# EAGLE board Nusbio 2 - IC2 Extension (EAGLE 9.6.2)

Size 90 x 90 mm. Coordinates in mm from the lower left corner, seen from the top.
Outline: 4,0 0,0 0,4
Outline: 4,0 7.5,0
Outline: 5.5,0 85,0
Outline: 85,0 90,0 90,4
Outline: 90,86 90,90 86,90
Outline: 5,90 0,90 0,86
Outline: 0,4 0,86
Outline: 0,86 arc-90 4,90 5,90
Outline: 5,90 86,90
Outline: 86,90 arc-90 90,86
Outline: 90,86 90,4
Outline: 90,4 arc-90 86,0 85,0
Outline: 85,0 4,0
Outline: 4,0 arc-90 0,4
Copper layers (1*16): Top 0.035mm / dielectric 1.5mm / Bottom 0.035mm
Design rules "default": minimum track width 10mil, minimum drill 24mil, track to track 8mil, track to pad 8mil, pad to pad 8mil, via to via 8mil, smd to smd 8mil, copper to edge 40mil, drill to drill 8mil, minimum pad ring 10mil, minimum via ring 8mil, stop-mask expansion 4mil, vias tented up to drill 0mil, thermal gap 10mil

## Footprints (pad centres in the part's own frame; a part is rotated, then mirrored left to right if it is on the bottom)
1X10-BIG = drill 1.016 pad 1.778 octagon: 1 -11.43,0; 2 -8.89,0; 3 -6.35,0; 4 -3.81,0; 5 -1.27,0; 6 1.27,0; 7 3.81,0; 8 6.35,0; 9 8.89,0; 10 11.43,0
1X06 = drill 1.016 octagon: 1 -6.35,0; 2 -3.81,0; 3 -1.27,0; 4 1.27,0; 5 3.81,0; 6 6.35,0
3,3-PAD = drill 3.3 pad 5.842: B3,3 0,0
1X04 = drill 1.016 long: 1 -3.81,0; 2 -1.27,0; 3 1.27,0; 4 3.81,0
1206 = smd 1.6 x 1.803: A -1.422,0; C 1.422,0
R1206 = smd 1.6 x 1.803: 1 -1.422,0; 2 1.422,0
SOIC8_150MIL = smd 0.6 x 2.2: 1 -1.905,-2.6; 2 -0.635,-2.6; 3 0.635,-2.6; 4 1.905,-2.6; 5 1.905,2.6; 6 0.635,2.6; 7 -0.635,2.6; 8 -1.905,2.6

## Placement (x,y rotation side)
ADS_1115_CONNECTOR  PINHD-1X10  [1X10-BIG]  66,65 270 top
ADS_1115_IN  [1X06]  87.5,40.5 90 top
GPIO_IN  PINHD-1X10  [1X10-BIG]  45,2.26 180 top
GPIO_OUT  PINHD-1X10  [1X10-BIG]  45,87.5 180 top
H1  MOUNT-PAD-ROUND3.3  [3,3-PAD]  6,84 0 top
H2  MOUNT-PAD-ROUND3.3  [3,3-PAD]  84,84 0 top
H3  MOUNT-PAD-ROUND3.3  [3,3-PAD]  6,6 0 top
H4  MOUNT-PAD-ROUND3.3  [3,3-PAD]  84,6 0 top
IC2_OLED_OUT  [1X04]  39.5,25 90 top
IC2_OUT_1  [1X04]  3,18 270 top
IC2_OUT_2  [1X04]  3,34 270 top
IC2_OUT_3  [1X04]  3,50 270 top
IC2_OUT_4  [1X04]  3,66 270 top
LED_POWER  [1206]  45.89,12.31 0 top
R_4K_POWER  [R1206]  25.5,12.5 0 top
U1  [SOIC8_150MIL]  34,47 270 top

## Library data of the parts
ADS_1115_CONNECTOR ADS_1115_IN GPIO_IN GPIO_OUT LED_POWER R_4K_POWER = adafruit
H1-H4 = holes
IC2_OLED_OUT IC2_OUT_1-IC2_OUT_4 = pinhead
U1 = microbuilder

## Nets
ADS_A0: ADS_1115_CONNECTOR.7 ADS_1115_IN.6
ADS_A1: ADS_1115_CONNECTOR.8 ADS_1115_IN.5
ADS_A2: ADS_1115_CONNECTOR.9 ADS_1115_IN.4
ADS_A3: ADS_1115_CONNECTOR.10 ADS_1115_IN.3
ADS_ALERT: ADS_1115_CONNECTOR.6
GND: ADS_1115_CONNECTOR.2 ADS_1115_CONNECTOR.5 ADS_1115_IN.1 GPIO_IN.10 GPIO_OUT.10 IC2_OLED_OUT.1 IC2_OUT_1.2 IC2_OUT_2.2 IC2_OUT_3.2 IC2_OUT_4.2 R_4K_POWER.1 U1.1 U1.2 U1.3 U1.4 U1.7
N$2: LED_POWER.C R_4K_POWER.2
SCL: ADS_1115_CONNECTOR.3 GPIO_IN.1 GPIO_OUT.1 IC2_OLED_OUT.3 IC2_OUT_1.3 IC2_OUT_2.3 IC2_OUT_3.3 IC2_OUT_4.3 U1.6
SDA: ADS_1115_CONNECTOR.4 GPIO_IN.2 GPIO_OUT.2 IC2_OLED_OUT.4 IC2_OUT_1.4 IC2_OUT_2.4 IC2_OUT_3.4 IC2_OUT_4.4 U1.5
VCC: ADS_1115_CONNECTOR.1 ADS_1115_IN.2 GPIO_IN.9 GPIO_OUT.9 IC2_OLED_OUT.2 IC2_OUT_1.1 IC2_OUT_2.1 IC2_OUT_3.1 IC2_OUT_4.1 LED_POWER.A U1.8

## Tracks (layer width: path | path; a pad name or v marks a point on that pad's centre or on a via)
ADS_A0  (1 unrouted)
ADS_A1  (1 unrouted)
ADS_A2  (1 unrouted)
ADS_A3  (1 unrouted)
GND  (15 unrouted)
N$2  (1 unrouted)
SCL  (8 unrouted)
SDA  (8 unrouted)
VCC  (10 unrouted)

## Text on the board
tNames: GND | VCC | 1 SDA | 0 SCL | VCC | GND | SCL | VCC | SDA | GND | ADDR (GND) | SCL | ALERT | SDA | A0 | A1 | A2 | VCC | A3 | GND | EEPROM_AT24C256 | SCL | A0 | VCC | A0 | A1 | WP | SDA | A2 | SCL | GND | SDA | A1 | A2 | A3 | VCC | VCC | GND | GND | SCL | SDA | SDA | SCL | VCC | VCC | GND | GND | SCL | SDA | POWER | + | GND | VCC | 1 SDA | 0 SCL
bNames: www.FredericTorres.com | PCBv2 - 2023.10